# EAGLE board sensor_board_aprik_30 (EAGLE 6.6.0)
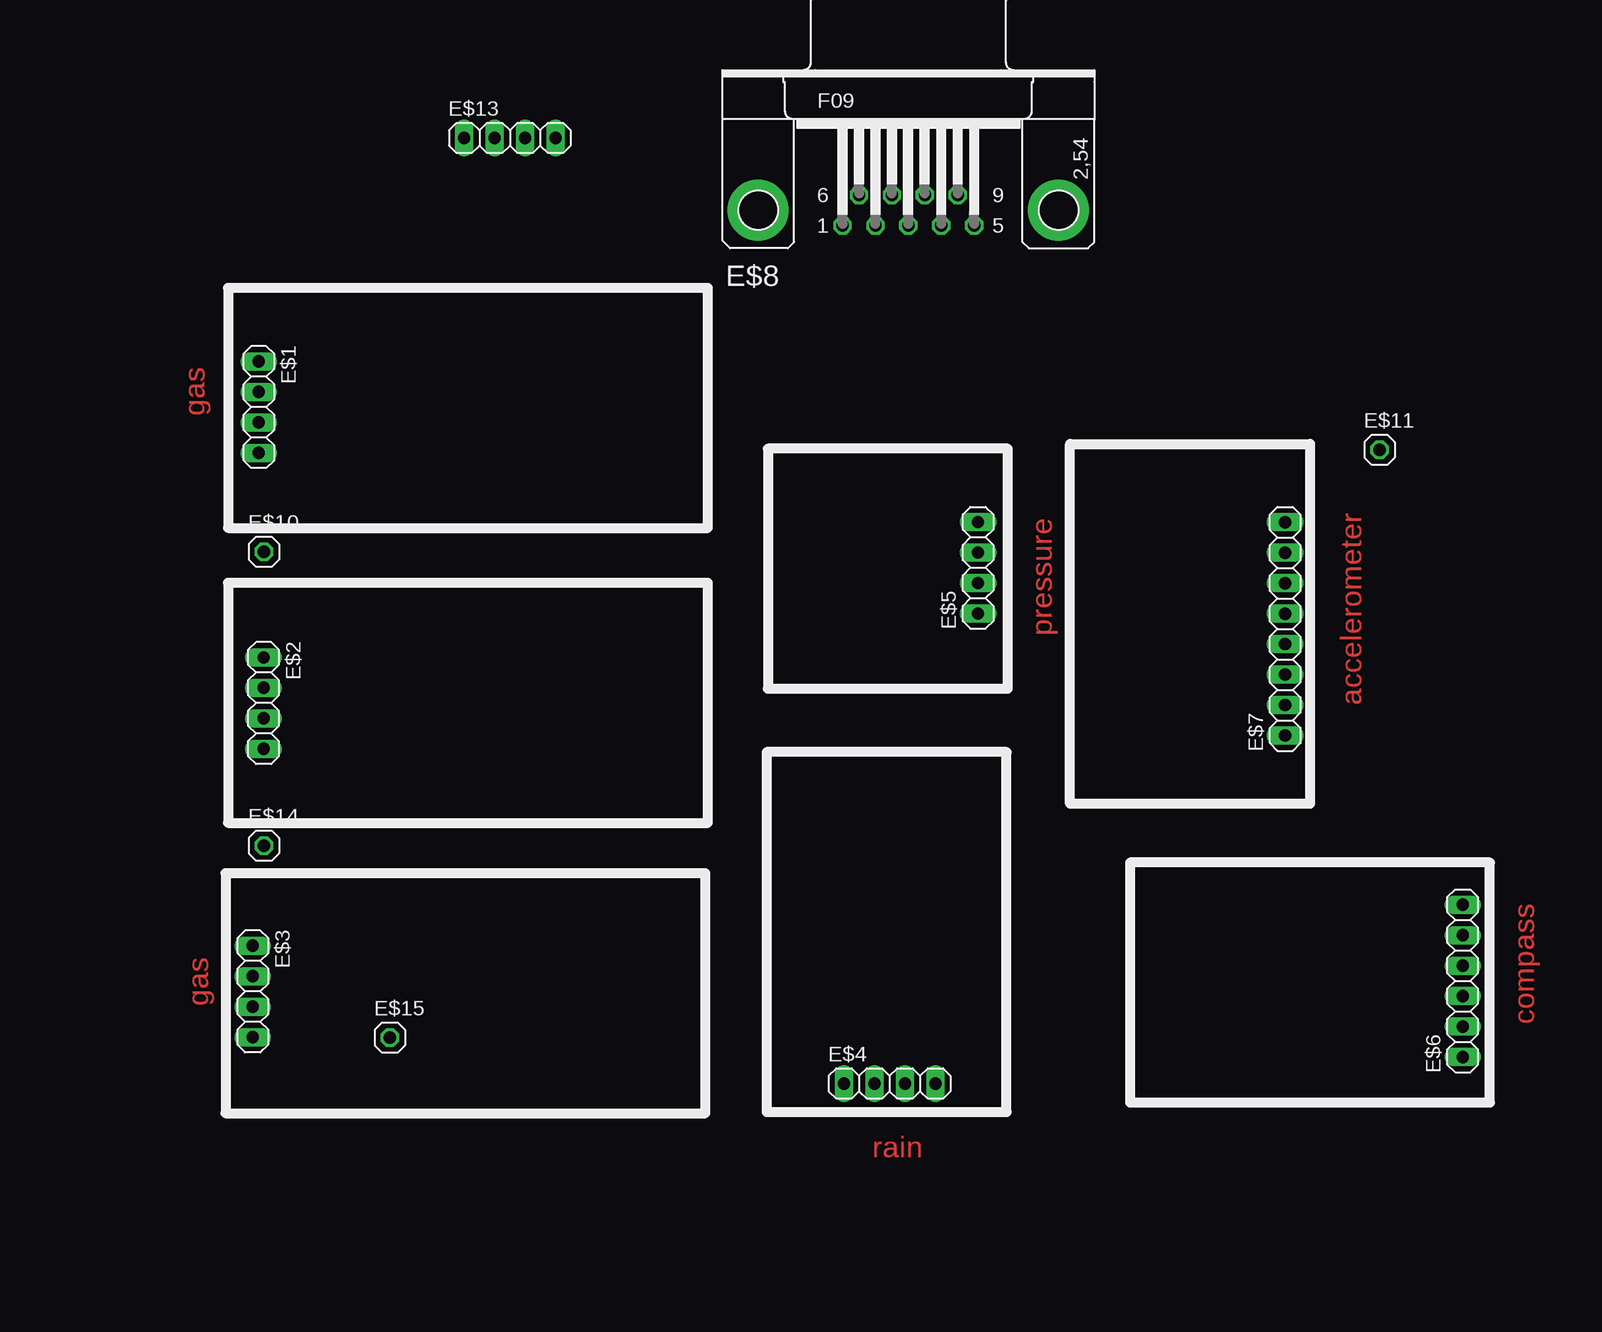
[diagram p0: board, top side]
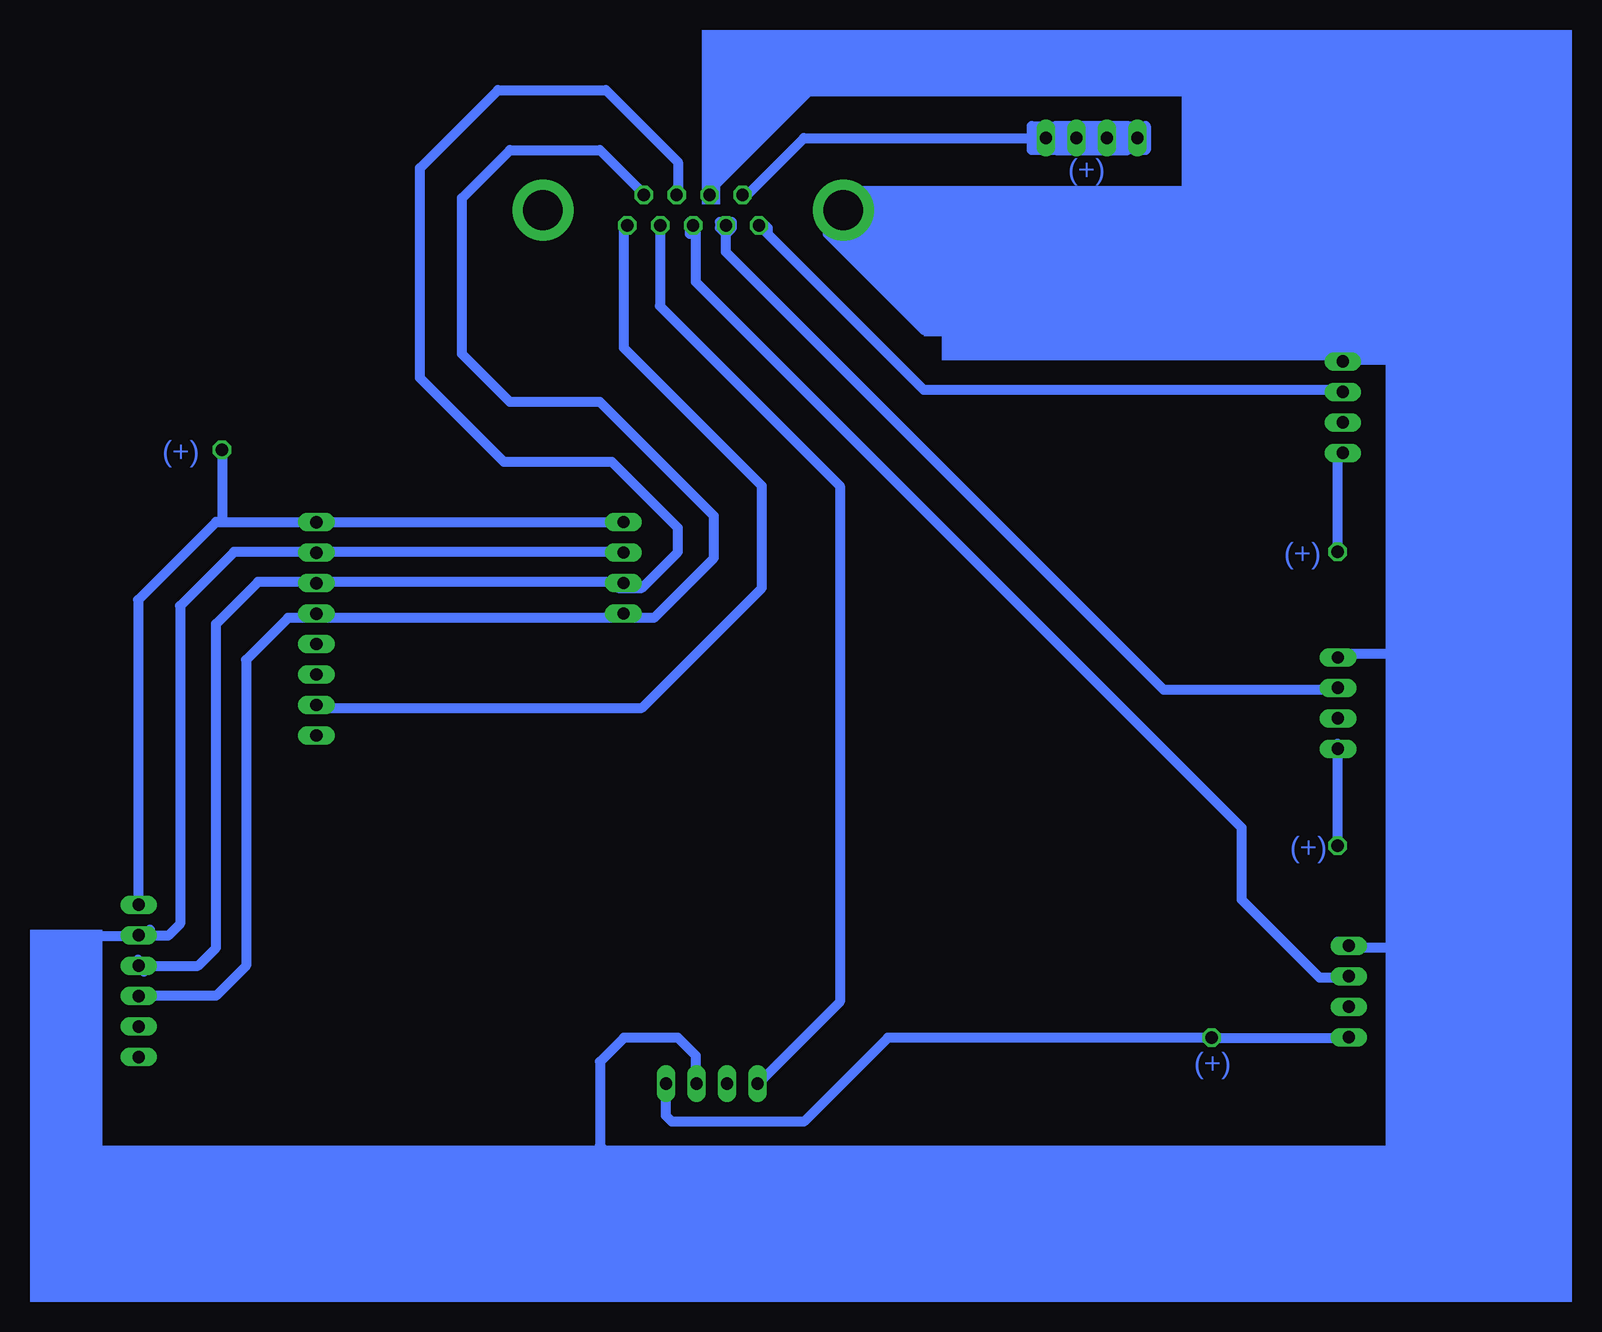
[diagram p1: board, bottom side, seen from below]

No outline drawn. Coordinates in mm, seen from the top.
Copper layers (1*16): Top 0.035mm / dielectric 1.5mm / Bottom 0.035mm
Design rules "default": minimum track width 10mil, minimum drill 24mil, track to track 8mil, track to pad 8mil, pad to pad 8mil, via to via 8mil, smd to smd 8mil, copper to edge 40mil, drill to drill 8mil, minimum pad ring 10mil, minimum via ring 8mil, stop-mask expansion 4mil, vias tented up to drill 0mil, thermal gap 10mil

## Footprints (pad centres in the part's own frame; a part is rotated, then mirrored left to right if it is on the bottom)
1X04 = drill 1.016 long: 1 -3.81,0; 2 -1.27,0; 3 1.27,0; 4 3.81,0
1X06 = drill 1.016 long: 1 -6.35,0; 2 -3.81,0; 3 -1.27,0; 4 1.27,0; 5 3.81,0; 6 6.35,0
1X08 = drill 1.016 long: 1 -8.89,0; 2 -6.35,0; 3 -3.81,0; 4 -1.27,0; 5 1.27,0; 6 3.81,0; 7 6.35,0; 8 8.89,0
F09HP = drill 1.016 octagon: 1 -5.486,-1.27; 2 -2.743,-1.27; 3 0,-1.27; 4 2.743,-1.27; 5 5.486,-1.27; 6 -4.115,1.27; 7 -1.372,1.27; 8 1.372,1.27; 9 4.115,1.27 | drill 3.302 pad 5.08: G1 -12.522,0; G2 12.522,0
1X01 = drill 1.016 octagon: 1 0,0

## Placement (x,y rotation side)
E$1  [1X04]  19.07,74.56 270 top
E$2  [1X04]  19.47,49.89 270 top
E$3  [1X04]  18.57,25.85 270 top
E$4  [1X04]  71.66,18.17 0 top
E$5  [1X04]  79.03,61.17 90 top
E$6  [1X06]  119.43,26.73 90 top
E$7  [1X08]  104.63,56.07 90 top
E$8  [F09HP]  73.22,90.98 0 top
E$10  [1X01]  19.5,62.5 0 top
E$11  [1X01]  112.5,71 0 top
E$13  [1X04]  40,97 0 top
E$14  [1X01]  19.5,38 0 top
E$15  [1X01]  30,22 0 top

## Library data of the parts
E$1-E$7 E$10 E$11 E$13-E$15 = pinhead
E$8 = con-subd

## Nets
S$3: E$10.1
S$4: E$14.1
S$6: E$15.1
S$9: E$11.1

## Tracks (layer width: path | path; a pad name or v marks a point on that pad's centre or on a via)
S$1
  Bottom 0.813: 69,92 64,97 37,97
S$2
  Bottom 0.813: 37,98 43,98 43,97.5 | 43,97 43,96 | 43,96 37,96 37,97.5 | 37,97.5 37,98 | 37,97.5 43,97.5 | 43,97.5 43,97 | 43,97 42.5,96.5 37.5,96.5 | 37,98 35.5,98 35.5,96 36.5,96 36.5,97.5 36,97 | 36,97 36,97.5 | 36,97 36,96.5 | 43,96 44,96 | 44,96 44,97 | 44,96 45,96 45,98 44,98 44,97 | 44,97 44.5,96.5 44.5,97.5
S$3
  Bottom 0.813: E$10.1 19.5,70.5 18.5,70.5
S$4
  Bottom 0.813: E$14.1 19.5,46.5
S$5
  Bottom 0.813: 67.5,89.5 67,89 | 67,89 67,89.5 67.5,90 | 19,76 54,76 67,89
S$6
  Bottom 0.813: 18,22 E$15.1 57,22 64,15 75,15 75.5,15.5 75.5,19
S$7
  Bottom 0.813: 19,51 34,51 70.5,87.5 70.5,89.5
S$8
  Bottom 0.813: 70,90 71,90 71,89.5 70.5,89 70,89.5 70,90
S$9
  Bottom 0.813: 112.5,65 113,65 119.5,58.5 119.5,33 118.5,33 | 112.5,65 78.5,65 | E$11.1 112.5,65
S$10
  Bottom 0.813: 36.5,101 37,101.5
S$11
  Bottom 0.813: 73,89.5 73.5,89 73.5,89.5
S$12
  Bottom 0.813: 52.5,81 54,81 62,89
S$13
  Bottom 0.813: 73,18 73,20.5 74.5,22 79,22 81,20 81,13 78.5,10.5 | 78.5,10.5 15,10.5 11,14.5 11,31 | 72,92.5 63.5,101 32,101 | 32,101 23,101 11,89 11,80 | 11,80 12.5,78.5 20,78.5 | 11,80 11,55.5 | 11,55.5 12.5,54 20,54 20.5,53.5 | 11,55.5 11,31 | 11,31 12.5,29.5 19,29.5 19.5,30 | 32,101 32,93 35,90 59,90 | 78.5,10.5 121,10.5 127.5,17 127.5,27 124,30.5 119,30.5 118.5,31
S$14
  Bottom 0.813: 119.5,28 119,27.5
S$16
  Bottom 0.813: 76,90 76,83 61,68 61,25 68,18
S$17
  Bottom 0.813: 18,27 21,27 27.5,33.5 27.5,39.5 73,85 73,89.5 73.5,90
S$18
  Bottom 0.813: 77.5,92.5 81,96 88.5,96 92.5,92 92.5,79 88.5,75 81,75 71.5,65.5 71.5,62 76.5,57 105,57 | 105,57 105.5,57.5 | 105,57 107,57 110.5,53.5 110.5,28 113,25.5 120,25.5
S$19
  Bottom 0.813: 79.5,59.5 77.5,59.5 74.5,62.5 74.5,64.5 80,70 89,70 96,77 96,94.5 89.5,101 80.5,101 74.5,95 74.5,92
S$20
  Bottom 0.813: 79,62.5 111.5,62.5 116,58 116,31.5 117,30.5 120,30.5
S$21
  Bottom 0.813: 105.5,49.5 77.5,49.5 67.5,59.5 67.5,68 79,79.5 79,89.5 78.5,90
S$22
  Bottom 0.813: 119.5,28.5 119,28 114.5,28 113,29.5 113,56.5 109.5,60 79,60
S$23
  Bottom 0.813: 43.5,98 43.5,96.5
(copper drawn outside any net)
  shapes: Bottom area x37

## Text on the board
Top: gas | pressure | accelerometer | gas | compass | rain
Bottom: (-) | (+) | (+) | (+) | (+) | (+)